# Altium PCB PCB.PcbDoc
Units mil, origin at the board's own origin, x right, y up, seen from the top; angles counter-clockwise.
Board outline 1916 x 1604 mil, 2 copper layers (Top Layer, Bottom Layer); 44 components, 38 nets, 187 pads, 12 vias.
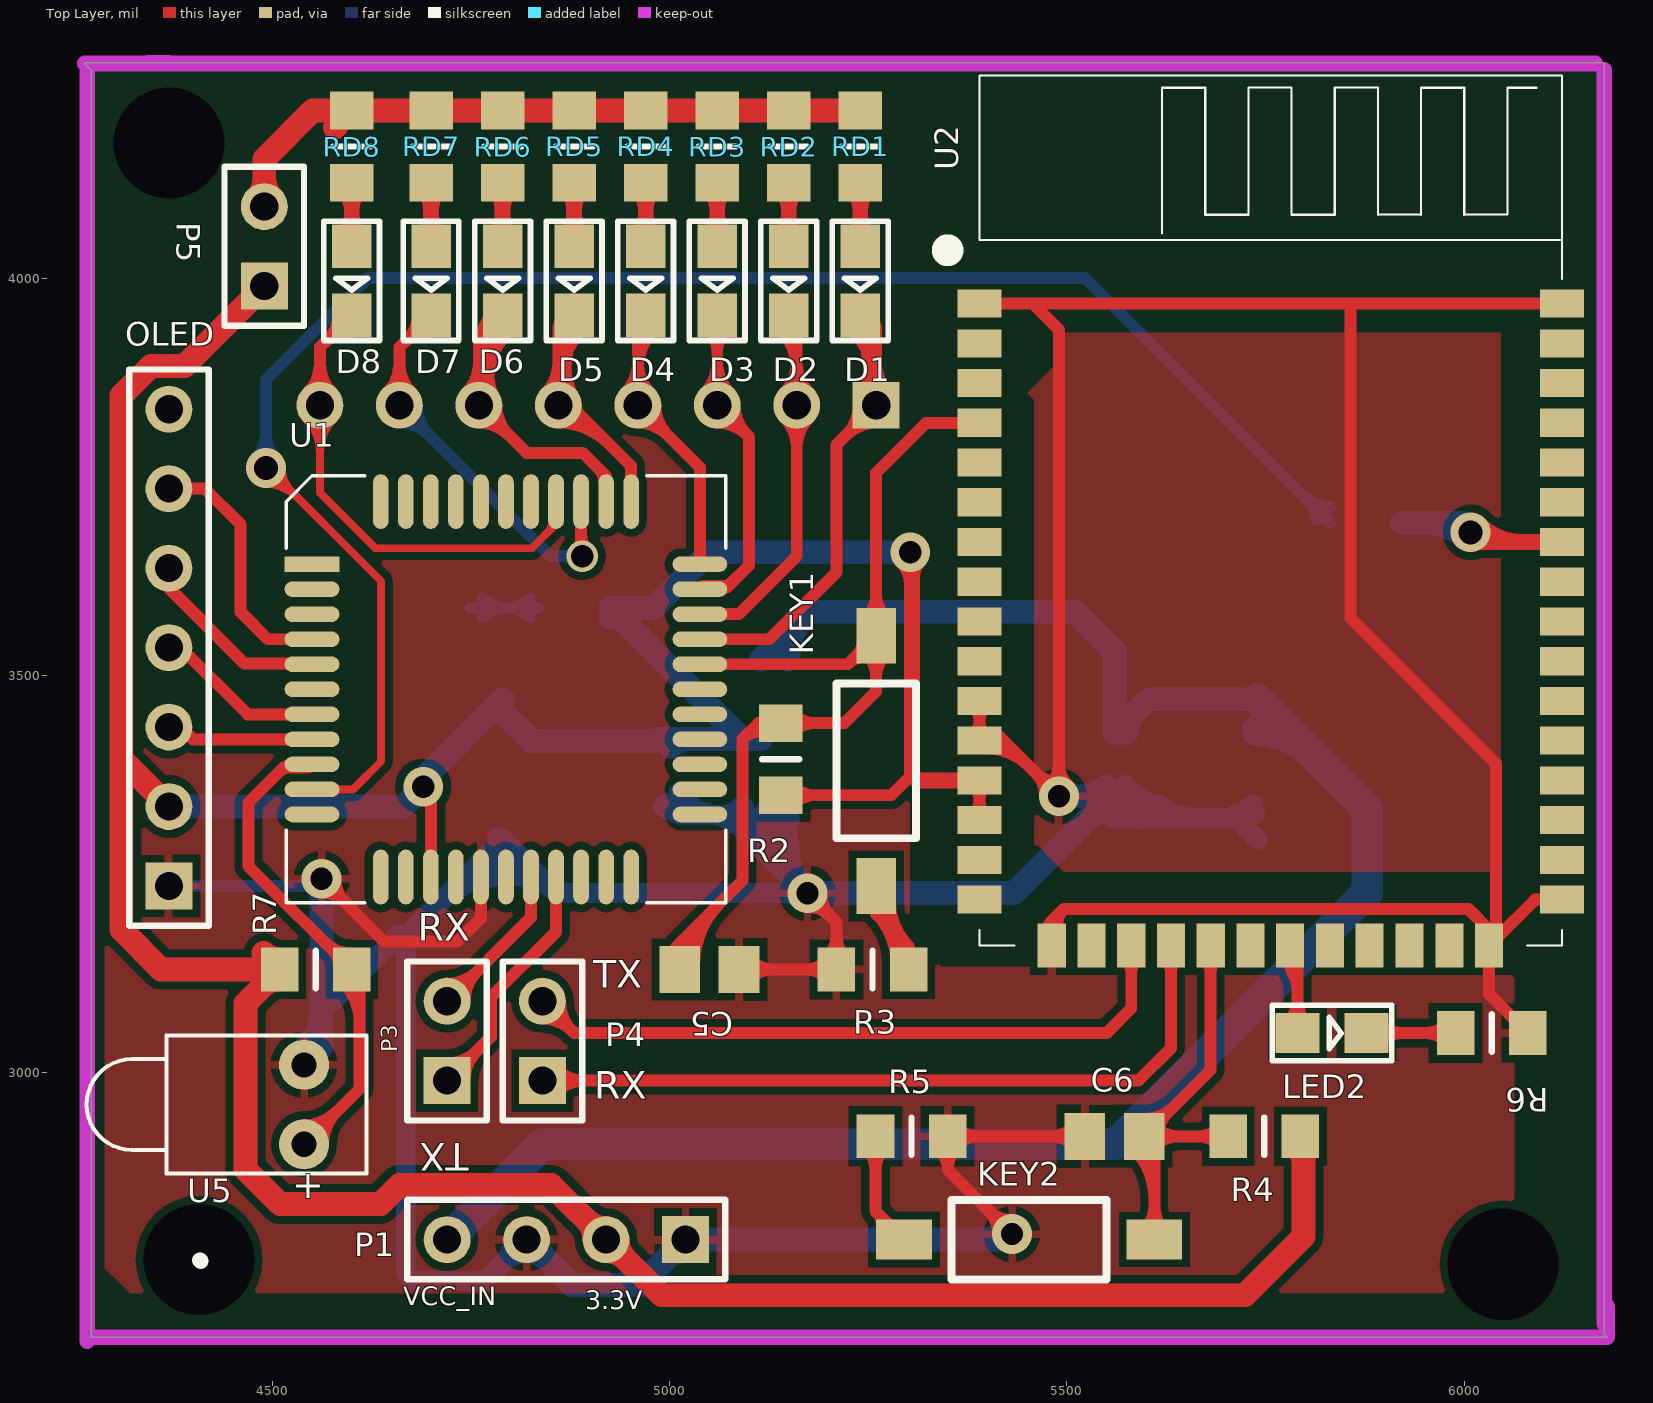
[diagram p0: Top Layer view]
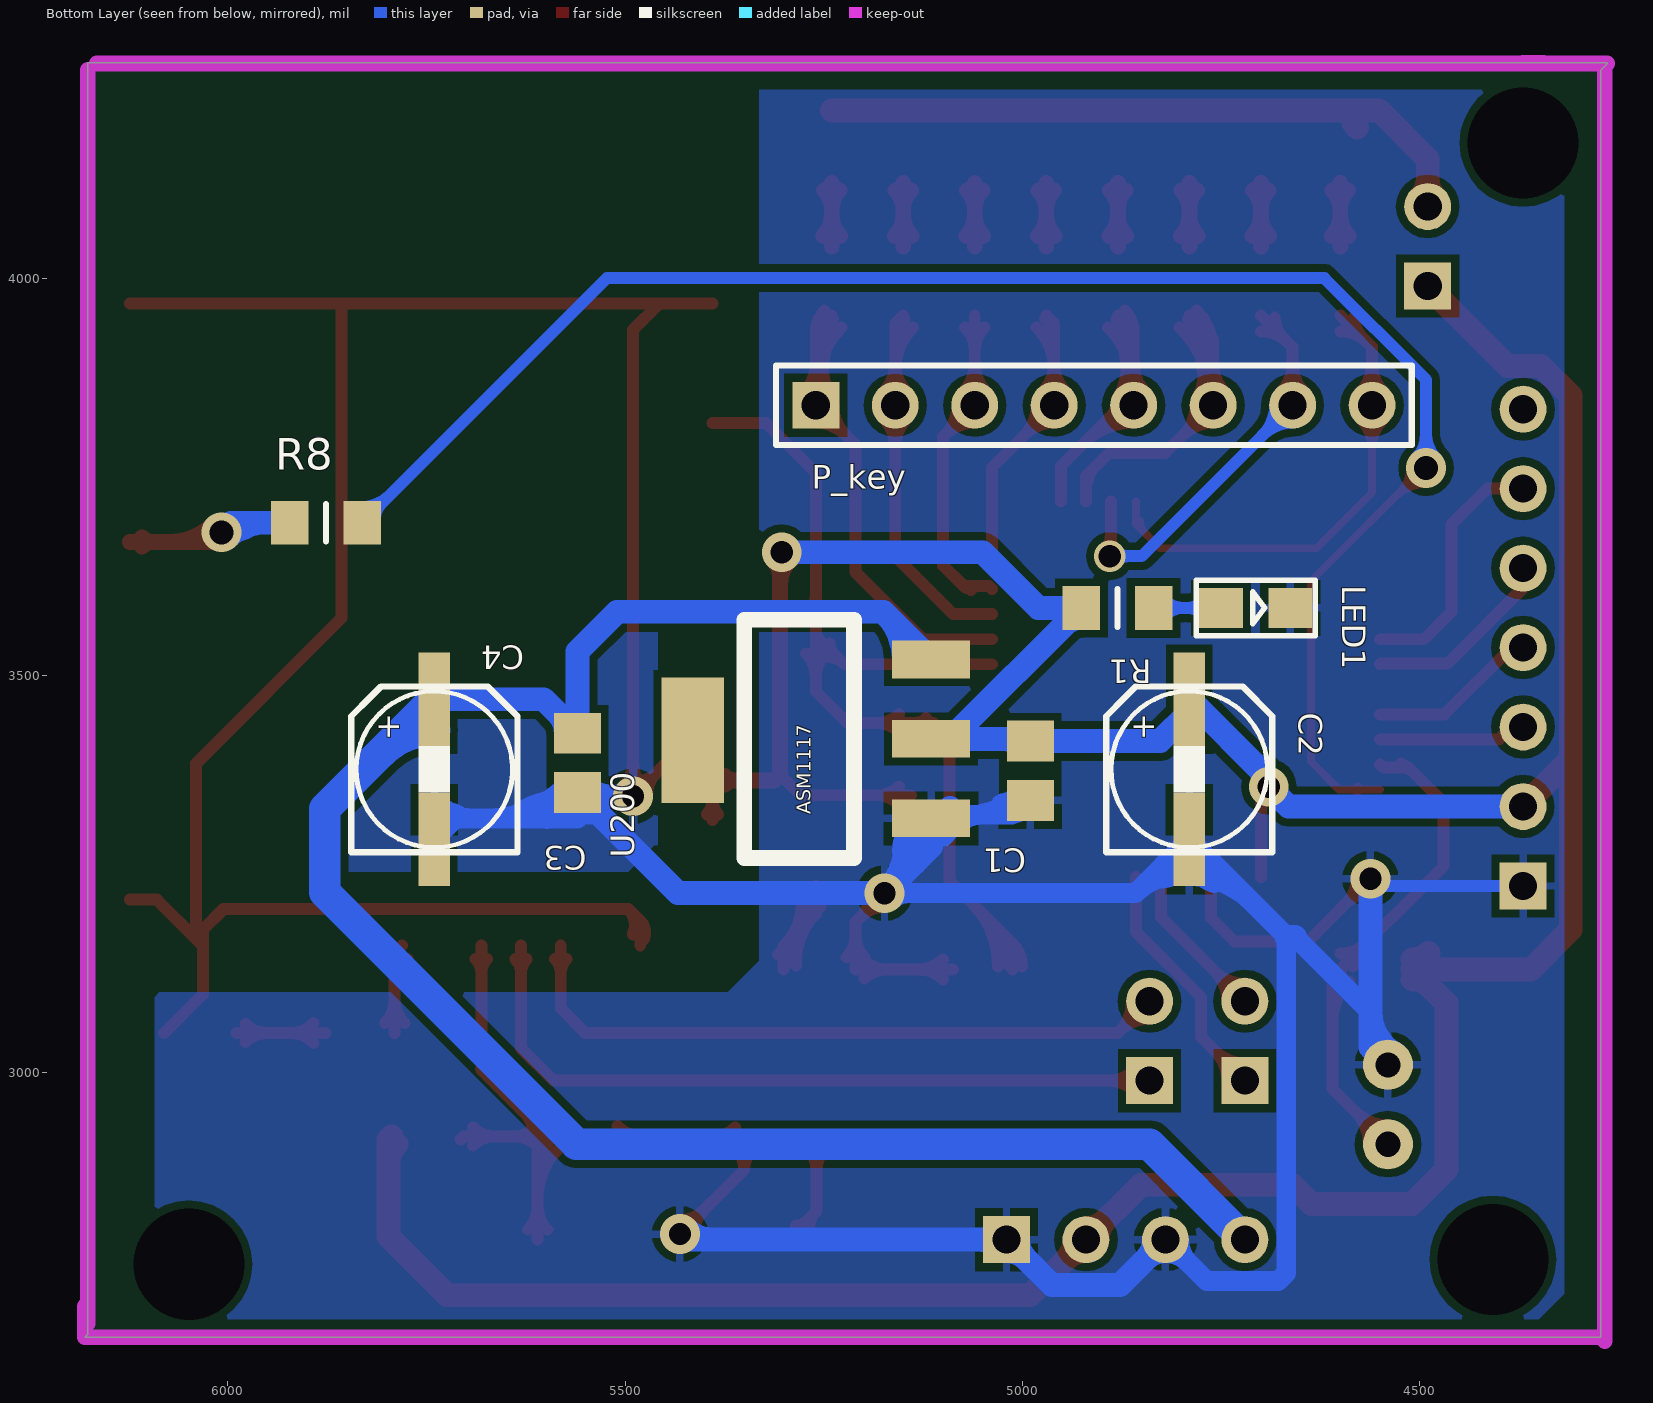
[diagram p1: Bottom Layer view, seen from below]

## Layer stack, top to bottom
Top Layer: signal copper 1.4
Dielectric: dielectric 12.6, FR-4, Dk 4.8
Bottom Layer: signal copper 1.4

## Board outline
4264,4270 4272,4262 4272,2667 6180,2667 6176,2671 6176,4271 4265,4271 4264,4270

## Design rules (kind name [scope] priority, off if disabled: settings)
Clearance [All] p1: gap=10
PolygonConnect [All] p1: connectstyle=Relief reliefconductorwidth=10 reliefentries=4 polygonreliefangle="90 Angle" airgapwidth=10
RoutingVias [All] p1: holewidth=28 width=50 viastyle="Through Hole" minholewidth=28 minwidth=50 maxholewidth=28 maxwidth=50
SolderMaskExpansion [All] p1: expansion=4
Width [All] p1: maxlimit=50 minlimit=10 preferedwidth=15
28 further rules are at their usual default settings.

## Components (designator, comment, footprint, x,y, rotation, side; value= is the part's Value field where it differs from the comment)
C1 "104" 0805-2 4990,3380 r90 bottom
C2 "10uf/16v" SMD-EC-F5 4790,3470 r270 bottom
C3 "104" 0805-2 5560,3390 r270 bottom
C4 "10uf/16v" SMD-EC-F5 5740,3470 r270 bottom
C5 "" 0805-2 5050,3130 r180 top
C6 "" 0805-2 5560,2920 r0 top
D1 "LED" SMDLED 5240,4040 r270 top
D2 "LED" SMDLED 5150,4040 r270 top
D3 "LED" SMDLED 5060,4040 r270 top
D4 "LED" SMDLED 4970,4040 r270 top
D5 "LED" SMDLED 4880,4040 r270 top
D6 "LED" SMDLED 4790,4040 r270 top
D7 "LED" SMDLED 4700,4040 r270 top
D8 "LED" SMDLED 4600,4040 r270 top
KEY1 "BUTTON" BUTTON贴片按键3*6*2.5 5260,3550 r330 top
KEY2 "BUTTON" BUTTON贴片按键3*6*2.5 5610,2790 r240 top
LED1 "LED1" SMDLED 4750,3585 r180 bottom
LED2 "LED2" SMDLED 5790,3050 r0 top
OLED "Header 7" HDR1X7 4370,3235 r90 top
P1 "Header 4" HDR1X4 5020,2790 r180 top
P3 "跳帽" HDR1X2 4720,2990 r90 top
P4 "" HDR1X2 4840,2990 r90 top
P5 "跳帽（灯开关）" HDR1X2 4490,3990 r90 top
P_key "Header 8" HDR1X8 5260,3840 r180 bottom
R1 "3kΩ" 贴片0805-有丝印 4835,3585 r0 bottom
R2 "4K" 贴片0805-有丝印 5140,3440 r270 top
R3 "100R" 贴片0805-有丝印 5210,3130 r0 top
R4 "4K" 贴片0805-有丝印 5703,2920 r0 top
R5 "100R" 贴片0805-有丝印 5350,2920 r180 top
R6 "?" 贴片0805-有丝印 6080,3050 r180 top
R7 "100R" 贴片0805-有丝印 4600,3130 r180 top
R8 "0R" 贴片0805-有丝印 5831,3692 r0 bottom
RD1 "200" 贴片0805-有丝印 5240,4120 r90 top
RD2 "200" 贴片0805-有丝印 5150,4120 r90 top
RD3 "200" 贴片0805-有丝印 5060,4120 r90 top
RD4 "200" 贴片0805-有丝印 4970,4120 r90 top
RD5 "200" 贴片0805-有丝印 4880,4120 r90 top
RD6 "200" 贴片0805-有丝印 4790,4120 r90 top
RD7 "200" 贴片0805-有丝印 4700,4120 r90 top
RD8 "200" 贴片0805-有丝印 4600,4120 r90 top
U1 "STC15L2K60S2_QFP44" PQFP44 4550,3640 r0 top
U2 "WH-BLE102-V1.1" WH-BLE102-V1.1 5390,3160 r0 top
U5 "IRLED" LED-1 4540,2960 r180 top
U200 "AMS1117" ASM117稳压芯片 5115,3320 r90 bottom

## Footprints (in the part's own frame and the unit in brackets; to place one, negate y for a bottom-side part, rotate by r counter-clockwise, add the part's x,y. Pads: shape width x height; smd on the part's side, far side on the other; paste and mask are expansions set on the pad)
0805-2 [mm]
  rect 1.3x1.5 smd: 1(-0.95,0) 2(0.95,0)
ASM117稳压芯片 [mm]
  rect 1.2x2.5 smd: 1(0,0) 2(2.54,0) 3(5.08,0)
  rect 4x2 smd: 4(2.5,7.62)
  silkscreen extent -1.27,2.46 6.35,5.97
BUTTON贴片按键3*6*2.5 [mil]
  rect 70x50 smd rot 120: 1(0,0) 2(157.48,-272.76)
  silkscreen extent -13,-246 171,-27
HDR1X2 [mm] "Connector; Header; 2 Position"
  rect 1.5x1.5 hole 0.9: 1(0,0)
  round 1.5 hole 0.9: 2(2.54,0)
  silkscreen extent -1.27,-1.27 3.81,1.27
HDR1X4 [mm] "Connector; Header; 4 Position"
  rect 1.5x1.5 hole 0.9: 1(0,0)
  round 1.5 hole 0.9: 2(2.54,0) 3(5.08,0) 4(7.62,0)
  silkscreen extent -1.27,-1.27 8.89,1.27
HDR1X7 [mm] "Connector; Header; 7 Position"
  rect 1.5x1.5 hole 0.9: 1(0,0)
  round 1.5 hole 0.9: 2(2.54,0) 3(5.08,0) 4(7.62,0) 5(10.16,0) 6(12.7,0) 7(15.24,0)
  silkscreen extent -1.27,-1.27 16.51,1.27
HDR1X8 [mm] "Connector; Header; 8 Position"
  rect 1.5x1.5 hole 0.9: 1(0,0)
  round 1.5 hole 0.9: 2(2.54,0) 3(5.08,0) 4(7.62,0) 5(10.16,0) 6(12.7,0) 7(15.24,0) 8(17.78,0)
  silkscreen extent -1.27,-1.27 19.05,1.27
LED-1 [mm] "LED; 2 Leads"
  round 1.6 hole 0.8: 1(0,1.27) 2(0,-1.27)
  silkscreen extent -2,-2.2 6.95,2.2
PQFP44 [mm]
  rect 1.75x0.5 smd: 1(0,0)
  oval 1.75x0.5 smd: 2(0,-0.8) 3(0,-1.6) 4(0,-2.4) 5(0,-3.2) 6(0,-4) 7(0,-4.8) 8(0,-5.6) 9(0,-6.4) 10(0,-7.2) 11(0,-8) 23(12.4,-8) 24(12.4,-7.2) 25(12.4,-6.4) 26(12.4,-5.6) 27(12.4,-4.8) 28(12.4,-4) 29(12.4,-3.2) 30(12.4,-2.4) 31(12.4,-1.6) 32(12.4,-0.8) 33(12.4,0)
  oval 0.5x1.75 smd: 12(2.2,-10) 13(3,-10) 14(3.8,-10) 15(4.6,-10) 16(5.4,-10) 17(6.2,-10) 18(7,-10) 19(7.8,-10) 20(8.6,-10) 21(9.4,-10) 22(10.2,-10) 34(10.2,2) 35(9.4,2) 36(8.6,2) 37(7.8,2) 38(7,2) 39(6.2,2) 40(5.4,2) 41(4.6,2) 42(3.8,2) 43(3,2) 44(2.2,2)
  silkscreen extent -0.82,-10.83 13.23,2.82
SMD-EC-F5 [mm]
  rect 3x1 smd: 1(0,0) 2(4.477,0)
  silkscreen extent -0.41,-2.65 4.89,2.66
SMDLED [mm]
  rect 1.4x1.27 smd: 1(0.001,-0.002) 2(2.211,-0.002)
  silkscreen extent -0.8,-0.89 3.01,0.89
WH-BLE102-V1.1 [mm]
  rect 1.4x0.9 smd: 1(0,20.52) 2(0,19.25) 3(0,17.98) 4(0,16.71) 5(0,15.44) 6(0,14.17) 7(0,12.9) 8(0,11.63) 9(0,10.36) 10(0,9.09) 11(0,7.82) 12(0,6.55) 13(0,5.28) 14(0,4.01) 15(0,2.74) 16(0,1.47) 29(18.62,1.47) 30(18.62,2.74) 31(18.62,4.01) 32(18.62,5.28) 33(18.62,6.55) 34(18.62,7.82) 35(18.62,9.09) 36(18.62,10.36) 37(18.62,11.63) 38(18.62,12.9) 39(18.62,14.17) 40(18.62,15.44) 41(18.62,16.71) 42(18.62,17.98) 43(18.62,19.25) 44(18.62,20.52)
  rect 0.9x1.4 smd: 17(2.31,0) 18(3.58,0) 19(4.85,0) 20(6.12,0) 21(7.39,0) 22(8.66,0) 23(9.93,0) 24(11.2,0) 25(12.47,0) 26(13.74,0) 27(15.02,0) 28(16.29,0)
  silkscreen extent -1.27,0 18.62,27.81
贴片0805-有丝印 [mm]
  rect 1.2x1.4 smd: 1(0,0) 2(2.308,0)
  silkscreen extent 1.15,-0.6 1.15,0.6, body extent 0.08,-0.7 2.23,0.7, height 0.7

## Part data
C1 C3 C5 C6: library part Cap, "无极性电容"
C2 C4: library part ECAP
LED1: library part LED2, "Typical RED, GREEN, YELLOW, AMBER GaAs LED"
LED2: "Typical RED, GREEN, YELLOW, AMBER GaAs LED"
OLED: "Header, 7-Pin"
P1: "Header, 4-Pin"
P3 P4 P5: library part "Header 2", "Header, 2-Pin"
P_key: "Header, 8-Pin"
R1: library part Res3, "Resistor"
R2 R3 R4 R5 R6 R7 R8 RD1 RD2 RD3 RD4 RD5 RD6 RD7 RD8: library part RES
U1: library part STC15F2K60S2_QFP44
U5: library part LED

## Via types
v1: diameter 50, hole 28, Top Layer to Bottom Layer, 6 vias
v2: diameter 50/50 (per signal layer), hole 139.76, Top Layer to Bottom Layer, 3 vias
v3: diameter 50/50 (per signal layer), hole 30, Top Layer to Bottom Layer, 2 vias
v4: diameter 40, hole 28, Top Layer to Bottom Layer, 1 vias

## Nets (pads, with @x,y where several pads share a name; then routed paths per layer and width w, separated by ;. In a path a pad name is that pad's centre, name@x,y a point inside that pad or via, vN(x,y) a via of type N, cw(c..) or ccw(c..) an arc to the next point about the centre after c; other vN are vias at no path point)
3.3V: C1.2 C2.1 OLED.2 P1.2 P5.1 R1.2 R2.2 R4.2 R7.2 U1.14 U2.13 U2.14 U200.2 | length 5746.4
  Top Layer w15: v1(4690,3360) 4699.61,3350.39 U1.14 ; R2.2 5279.13,3349.13 5305,3375 ; R2.2@5155.34,3337.73 cw(c5182.86,3310.21) 5182.86,3349.13 cw(c5182.86,3388.06) R2.2@5155.34,3360.53 ; U2.14@5382.78,3325.1 ccw(c5365.34,3342.54) 5390,3342.54 ccw(c5414.66,3342.54) U2.14@5397.22,3325.1 ; U2.13@5382.78,3360.65 cw(c5365.34,3343.21) 5390,3343.21 cw(c5414.66,3343.21) U2.13@5397.22,3360.65 ; U2.14 U2.13
  Top Layer w20: v1@5292.39,3644.39 cw(c5261.96,3613.96) 5305,3613.96 ; v1(5303,3655) 5305,3653 5305,3375 5312.13,3367.87 U2.13 ; 5305,3623.62 cw(c5334.38,3623.62) v1@5313.61,3644.39 ; U2.13@5374.7,3362.42 ccw(c5361.53,3349.24) 5361.53,3367.87 ccw(c5361.53,3386.5) U2.13@5374.7,3373.33
  Top Layer w30: OLED.2 4310,3395 ; R7.2@4487.69,3108.56 cw(c4509.13,3087.12) R7.2@4509.13,3117.44 ; P5.1 4389.53,3889.53 4347.41,3889.53 4310,3852.11 4310,3395 ; P1.2@4905.47,2790 ccw(c4870.4,2790) 4895.2,2814.8 ccw(c4920,2839.6) P1.2@4920,2804.53 ; P1.2@4920,2775.47 cw(c4920,2740.4) 4944.8,2765.2 cw(c4969.6,2790) P1.2@4934.53,2790 ; R4.2 5797.87,2916 5797.87,2793.87 5724,2720 4990,2720 P1.2 4851,2859 4660,2859 4636,2835 4510,2835 4466.5,2878.5 4466.5,3087.36 R7.2 4360,3130 4310,3180 4310,3395 ; R7.2@4489.17,3150.83 ccw(c4509.13,3170.79) 4509.13,3142.56 cw(c4509.13,3170.79) R7.2@4489.17,3150.83 ; R4.2@5787.77,2909.97 cw(c5763.39,2885.59) 5797.87,2885.59 ccw(c5763.39,2885.59) R4.2@5787.77,2909.97
  Bottom Layer w30: OLED.2 4665,3335 v1(4690,3360) 4690,3370 C2.1 ; C2.1@4790,3454 4826.6,3417.4 C1.2 4987.4,3420 U200.2@5090.87,3420 ; R1.2@4925.87,3572.44 cw(c4925.87,3542.12) R1.2@4947.31,3563.56 ; C1.2@5001.43,3409.91 cw(c5025.78,3385.56) 5025.78,3420 ; U200.2 U200.2@5090.87,3420 ; v1(5303,3655) 5050,3655 4980,3585 R1.2 U200.2@5090.87,3420
GND: C1.1 C2.2 C3.2 C4.2 C5.1 C6.1 LED1.2 OLED.1 P1.1 P1.3 R3.1 R5.1 R6.1 U1.16 U2.1 U2.11 U2.12 U2.17 U2.28 U2.29 U2.44 U5.2 U200.1 | length 13006.9
  Top Layer w15: v1@4561.5,3241.55 cw(c4554.96,3209.6) 4586.45,3218.04 ; v1(4562,3244) 4641,3165 4733,3165 4762.6,3194.6 U1.16 ; v1@4564.45,3244.5 ccw(c4596.4,3251.04) 4587.96,3219.55 ; C5.1 R3.1 5210,3189.54 v1(5173.54,3226) ; v1@5173.04,3223.55 cw(c5166.5,3191.6) 5197.99,3200.04 ; v1@5175.99,3226.5 ccw(c5207.94,3233.04) 5199.5,3201.55 ; U2.12@5382.78,3425.1 ccw(c5365.34,3442.54) 5390,3442.54 ccw(c5414.66,3442.54) U2.12@5397.22,3425.1 ; U2.11@5382.78,3460.65 cw(c5365.34,3443.21) 5390,3443.21 cw(c5414.66,3443.21) U2.11@5397.22,3460.65 ; U2.11 5390,3425.1 5412.9,3425.1 v1(5490,3348) 5490,3935 5457.13,3967.87 ; U2.1 5457.13,3967.87 ; U2.12@5399.84,3407.66 cw(c5399.84,3334.02) 5451.91,3386.09 ; U2.12@5399.84,3422.66 cw(c5399.84,3385.24) 5426.3,3411.7 ; 5405.04,2821.45 cw(c5396.6,2789.96) v1@5428.55,2796.5 ; 5406.55,2822.96 ccw(c5438.04,2831.4) v1@5431.5,2799.45 ; v1(5431,2797) 5350,2878 ; v1@5472.5,3348 ccw(c5430.25,3348) 5460.13,3377.87 ccw(c5490,3407.75) v1@5490,3365.5 ; v1@5477.63,3360.37 ccw(c5447.75,3390.25) 5490,3390.25 ccw(c5532.25,3390.25) v1@5502.37,3360.37 ; U2.17 5480.94,3190.94 ; C6.1 R5.1 5350,2878 ; R6.1 6031.34,3098.66 U2.28 ; U2.29 6089.21,3217.87 U2.28@6040,3168.66 ; U2.44 5857,3967.87 ; 4591.87,3214.13 ccw(c4562,3184.25) 4562,3226.5 cw(c4562,3184.25) 4591.87,3214.13 ; 4591.87,3214.13 cw(c4621.75,3244) 4579.5,3244 ccw(c4621.75,3244) 4591.87,3214.13 ; 5131.08,3130 cw(c5131.08,3173.67) 5100.19,3142.79 ccw(c5131.08,3173.67) 5131.08,3130 ; 5131.08,3130 ccw(c5131.08,3086.33) 5100.19,3117.21 cw(c5131.08,3086.33) 5131.08,3130 ; 5171.08,3130 cw(c5171.08,3091.08) 5198.6,3118.6 ccw(c5171.08,3091.08) 5171.08,3130 ; 5171.08,3130 ccw(c5171.08,3168.92) 5198.6,3141.4 cw(c5171.08,3168.92) 5171.08,3130 ; 5203.41,3196.13 cw(c5233.29,3226) 5191.04,3226 ccw(c5233.29,3226) 5203.41,3196.13 ; 5203.41,3196.13 ccw(c5173.54,3166.25) 5173.54,3208.5 cw(c5173.54,3166.25) 5203.41,3196.13 ; 5210,3172.86 cw(c5171.08,3172.86) 5198.6,3145.34 ccw(c5171.08,3172.86) 5210,3172.86 ; 5210,3172.86 ccw(c5248.92,3172.86) 5221.4,3145.34 cw(c5248.92,3172.86) 5210,3172.86 ; 5350,2878 cw(c5386.87,2878) 5361.22,2904.48 ccw(c5386.87,2878) 5350,2878 ; 5350,2878 ccw(c5313.13,2878) 5338.78,2904.48 cw(c5313.13,2878) 5350,2878 ; 5388.92,2920 cw(c5388.92,2958.92) 5361.4,2931.4 ccw(c5388.92,2958.92) 5388.92,2920 ; 5388.92,2920 ccw(c5388.92,2881.08) 5361.4,2908.6 cw(c5388.92,2881.08) 5388.92,2920 ; 5401.13,2826.87 cw(c5371.25,2797) 5413.5,2797 ccw(c5371.25,2797) 5401.13,2826.87 ; 5401.13,2826.87 ccw(c5431,2856.75) 5431,2814.5 cw(c5431,2856.75) 5401.13,2826.87 ; 5457.13,3967.87 5857,3967.87 ; 5478.92,2920 cw(c5478.92,2876.33) 5509.81,2907.21 ccw(c5478.92,2876.33) 5478.92,2920 ; 5478.92,2920 ccw(c5478.92,2963.67) 5509.81,2932.79 cw(c5478.92,2963.67) 5478.92,2920 ; 5480.94,3190.94 cw(c5464.26,3190.94) 5474.61,3177.86 ccw(c5464.26,3190.94) 5480.94,3190.94 ; 5480.94,3190.94 ccw(c5497.63,3190.94) 5487.28,3177.86 cw(c5497.63,3190.94) 5480.94,3190.94 ; 5480.94,3190.94 5496,3206 ; 5496,3206 ccw(c5516.11,3185.89) 5490.24,3174.08 cw(c5516.11,3185.89) 5496,3206 ; 5496,3206 6005.36,3206 6031.34,3180.02 U2.28 ; 5857,3967.87 5857,3572 6040,3389 U2.28@6040,3168.66 ; U2.28 U2.28@6040,3168.66 ; U2.17@5476.59,3167.86 cw(c5495.12,3176.32) 5480.72,3190.72 ccw(c5495.12,3176.32) U2.17@5476.59,3167.86
  Bottom Layer w15: OLED.1 4553,3235 v1(4562,3244) ; C1.1 5012.6,3320 U200.1 ; C1.1@4995.67,3340.04 cw(c5014.34,3312.53) 5031.03,3341.28 ; C1.1@5000.82,3325.87 cw(c5014.53,3292.52) 5032.56,3323.75 ; C1.1@5004.09,3327.63 cw(c5029.2,3290.6) 5051.67,3329.29 ; C1.1@5011.41,3347.28 ccw(c5043.75,3355.95) 5027.01,3326.95 ; 5527.4,3320 5560,3320 ; C3.2@5555.4,3348 C3.2 ; 5050.49,3320 ccw(c5050.49,3358.92) 5078.01,3331.4 cw(c5050.49,3358.92) 5050.49,3320 ; 5050.49,3320 cw(c5050.49,3281.08) 5078.01,3308.6 ccw(c5050.49,3281.08) 5050.49,3320 ; 5560,3320 cw(c5580.32,3320) 5569.57,3337.25 ccw(c5580.32,3320) 5560,3320 ; 5560,3320 ccw(c5539.68,3320) 5550.43,3337.25 cw(c5539.68,3320) 5560,3320 ; C1.1@4985.52,3334.18 ccw(c5019.74,3368.4) 5019.74,3320 cw(c5019.74,3368.4) C1.1@4985.52,3334.18 ; C1.1@4996.12,3344.78 ccw(c5055.96,3404.62) 5055.96,3320 cw(c5055.96,3404.62) C1.1@4996.12,3344.78 ; C1.1@5006.73,3355.39 ccw(c5092.17,3440.83) 5092.17,3320 cw(c5092.17,3440.83) C1.1@5006.73,3355.39 ; 5050.33,3331.21 cw(c5039.63,3291.26) 5075.45,3311.94 ccw(c5039.63,3291.26) 5050.33,3331.21 ; 5053.66,3330.32 ccw(c5063.11,3365.56) 5081.35,3333.96 cw(c5063.11,3365.56) 5053.66,3330.32
  Bottom Layer w25: 4562,3076 4657,3171 ; 4758.86,3238.85 ccw(c4748.23,3278.49) C2.2@4783.78,3257.97 ; C2.2@4795.54,3258.95 ccw(c4827.2,3285.07) 4823.28,3244.22 ; P1.3 4767.97,2737.97 4678.03,2737.97 4667.97,2748.03 4667.97,3171 4667.97,3171.72 C2.2 4857.75,3226 ; v1(5173.54,3226) 4857.75,3226 ; 5560,3320 5713.75,3320 ; C3.2@5567.33,3339.95 cw(c5586.68,3267.73) 5624.07,3332.48 ; C3.2@5577,3353.52 ccw(c5619.65,3356.53) 5598.27,3319.49 ; 5710.54,3324.12 cw(c5726.42,3296.61) C4.2@5737.49,3326.38 ; 5711.06,3319.28 ccw(c5701.38,3355.42) C4.2@5733.78,3336.71 ; C4.2 5713.75,3320 ; 4790.93,2760.93 cw(c4820,2731.86) 4820,2772.97 ccw(c4820,2731.86) 4790.93,2760.93 ; 4790.93,2760.93 ccw(c4761.86,2790) 4802.97,2790 cw(c4761.86,2790) 4790.93,2760.93 ; 4857.75,3226 ccw(c4803.81,3172.07) 4791.19,3247.29 cw(c4803.81,3172.07) 4857.75,3226 ; 5143.36,3226 ccw(c5143.36,3256.18) 5164.7,3234.84 cw(c5143.36,3256.18) 5143.36,3226 ; 5143.36,3226 cw(c5143.36,3195.82) 5164.7,3217.16 ccw(c5143.36,3195.82) 5143.36,3226 ; 5713.75,3320 ccw(c5713.75,3339.94) 5733.05,3334.92 cw(c5713.75,3339.94) 5713.75,3320 ; 4710.53,3214.27 cw(c4790,3134.8) 4790,3247.19 ccw(c4790,3134.8) 4710.53,3214.27 ; 4753.2,3256.95 cw(c4790,3220.15) 4790,3272.19 ccw(c4790,3220.15) 4753.2,3256.95 ; C2.2@4782.92,3296.6 cw(c4784.1,3289.57) 4789.13,3294.61 ccw(c4784.1,3289.57) C2.2@4782.92,3296.6 ; C2.2@4787.05,3271.95 cw(c4793.95,3230.82) 4823.44,3260.31 ccw(c4793.95,3230.82) C2.2@4787.05,3271.95 ; C3.2@5555.52,3344.18 ccw(c5613.88,3402.55) 5613.88,3320 cw(c5613.88,3402.55) C3.2@5555.52,3344.18 ; 5560,3319.76 cw(c5587.08,3319.76) 5571.48,3341.9 ccw(c5587.08,3319.76) 5560,3319.76 ; C3.2@5573.19,3361.85 ccw(c5674.24,3462.9) 5674.24,3320 cw(c5674.24,3462.9) C3.2@5573.19,3361.85 ; 5690.98,3320 ccw(c5690.98,3382.13) 5734.92,3338.2 cw(c5690.98,3382.13) 5690.98,3320
  Bottom Layer w30: U5.2 4562,3032 4562,3076 ; U5.2@4552.69,3020.54 cw(c4567.22,3032.6) 4553.99,3046.08 ; v1(4562,3244) 4562,3076 ; 4657,3171 4667.97,3171 ; P1.3 4877,2733 4963,2733 P1.1 5424,2790 v1(5431,2797) ; U200.1@5108.91,3313.9 cw(c5082.27,3287.24) 5119.96,3287.26 ; U200.1 5115,3284.54 v1(5173.54,3226) ; U200.1@5134.5,3313.9 cw(c5099.69,3279.06) 5148.94,3279.08 ; v1(5490,3348) 5555.4,3348 5527.4,3320 5433.4,3226 v1(5173.54,3226) ; 5519.39,3348 ccw(c5519.39,3389.27) C3.2@5548.57,3360.09 ; 4562,3076 cw(c4502.68,3076) 4531.88,3024.36 ccw(c4502.68,3076) 4562,3076 ; 4844.8,2765.2 cw(c4869.6,2790) 4834.53,2790 ccw(c4869.6,2790) 4844.8,2765.2 ; 4844.8,2765.2 ccw(c4820,2740.4) 4820,2775.47 cw(c4820,2740.4) 4844.8,2765.2 ; P1.1@4995.2,2765.2 cw(c5020,2740.4) 5020,2775.47 ccw(c5020,2740.4) P1.1@4995.2,2765.2 ; P1.1@4995.2,2765.2 ccw(c4970.4,2790) 5005.47,2790 cw(c4970.4,2790) P1.1@4995.2,2765.2 ; 5055.07,2790 cw(c5055.07,2825.07) 5030.27,2800.27 ccw(c5055.07,2825.07) 5055.07,2790 ; 5055.07,2790 ccw(c5055.07,2754.93) 5030.27,2779.73 cw(c5055.07,2754.93) 5055.07,2790 ; v1(5173.54,3226) cw(c5240.76,3293.22) 5148.92,3317.77 ccw(c5240.76,3293.22) v1(5173.54,3226) ; C3.2@5535.2,3327.8 ccw(c5510.4,3352.6) C3.2@5545.47,3352.6 ; C3.2@5535.2,3327.8 ccw(c5510.4,3352.6) C3.2@5545.47,3352.6 ; C3.2@5535.2,3327.8 ccw(c5510.4,3352.6) C3.2@5545.47,3352.6 ; C3.2@5535.2,3327.8 ccw(c5510.4,3352.6) C3.2@5545.47,3352.6 ; C3.2@5535.2,3327.8 ccw(c5510.4,3352.6) C3.2@5545.47,3352.6 ; C3.2@5535.2,3327.8 ccw(c5510.4,3352.6) C3.2@5545.47,3352.6 ; U200.1@5090.96,3333.27 ccw(c5124.71,3324.24) 5100.01,3299.53 cw(c5124.71,3324.24) U200.1@5090.96,3333.27 ; U200.1@5119.94,3325.52 ccw(c5182.74,3308.73) 5136.77,3262.77 cw(c5182.74,3308.73) U200.1@5119.94,3325.52 ; 5389.96,2790 ccw(c5389.96,2838.04) 5423.93,2804.07 cw(c5389.96,2838.04) 5389.96,2790
INFRARED: R7.1 U1.9 U5.1 | length 946.8
  Top Layer w15: 4515.24,3382.97 ccw(c4511.78,3395.89) U1.9@4523.37,3389.2 ; U5.1 4610,2980 4610,3120 R7.1 4470,3260 4470,3339.81 4514.07,3383.88 ; U5.1@4540,2934 ccw(c4540,2991.93) 4580.96,2950.96 ccw(c4621.93,2910) U5.1@4564,2910 ; U1.9 4545.85,3383.88 4514.07,3383.88 ; 4565.76,3164.24 ccw(c4600,3198.49) R7.1@4600,3150.06 ; 4575.26,3154.74 cw(c4554.46,3133.94) R7.1@4583.88,3133.94 ; R7.1@4588.6,3114.66 cw(c4536.94,3063) 4610,3063 ; R7.1@4599.21,3125.27 cw(c4573.15,3099.21) 4610,3099.21 ; 4514.07,3383.88 cw(c4520.75,3377.2) 4524.47,3385.88 ccw(c4520.75,3377.2) 4514.07,3383.88 ; 4514.07,3383.88 ccw(c4514.07,3394.66) U1.9@4523.37,3389.21 ; 4514.07,3383.88 ccw(c4514.07,3394.66) U1.9@4523.37,3389.21 ; 4509.15,3378.96 cw(c4525.39,3362.72) 4525.39,3385.69 ccw(c4525.39,3362.72) 4509.15,3378.96
NetD1_1: D1.1 RD1.1 | length 188.6
  Top Layer w20: D1.1@5229.33,4053.13 ccw(c5203.72,4078.74) 5239.94,4078.74 ccw(c5276.15,4078.74) D1.1@5250.54,4053.13 ; RD1.1@5230.37,4110.37 cw(c5207.27,4087.27) 5239.94,4087.27 ; D1.1 5239.94,4119.94 RD1.1 ; 5239.94,4086.96 cw(c5273.04,4086.96) RD1.1@5249.63,4110.37
NetD2_1: D2.1 RD2.1 | length 188.6
  Top Layer w20: D2.1@5139.33,4053.13 ccw(c5113.57,4078.89) 5150,4078.89 ; RD2.1@5140.37,4110.37 cw(c5117.11,4087.11) 5150,4087.11 cw(c5182.89,4087.11) RD2.1@5159.63,4110.37 ; D2.1 5150,4040.03 RD2.1 ; 5150,4078.59 ccw(c5186,4078.59) D2.1@5160.54,4053.13
NetD3_1: D3.1 RD3.1 | length 188.6
  Top Layer w20: D3.1@5049.33,4053.13 ccw(c5023.72,4078.74) 5059.94,4078.74 ccw(c5096.15,4078.74) D3.1@5070.54,4053.13 ; RD3.1@5050.37,4110.37 cw(c5027.27,4087.27) 5059.94,4087.27 ; D3.1 5059.94,4119.94 RD3.1 ; 5059.94,4086.96 cw(c5093.04,4086.96) RD3.1@5069.63,4110.37
NetD4_1: D4.1 RD4.1 | length 188.6
  Top Layer w20: D4.1@4959.33,4053.13 ccw(c4933.57,4078.89) 4970,4078.89 ; RD4.1@4960.37,4110.37 cw(c4937.11,4087.11) 4970,4087.11 cw(c5002.89,4087.11) RD4.1@4979.63,4110.37 ; D4.1 4970,4040.03 RD4.1 ; 4970,4078.59 ccw(c5006,4078.59) D4.1@4980.54,4053.13
NetD5_1: D5.1 RD5.1 | length 188.5
  Top Layer w20: D5.1@4869.33,4053.13 ccw(c4843.72,4078.74) 4879.94,4078.74 ccw(c4916.15,4078.74) D5.1@4890.54,4053.13 ; RD5.1@4870.37,4110.37 cw(c4847.27,4087.27) 4879.94,4087.27 ; D5.1 RD5.1@4879.94,4119.94 ; 4879.94,4086.96 cw(c4913.04,4086.96) RD5.1@4889.63,4110.37
NetD6_1: D6.1 RD6.1 | length 188.6
  Top Layer w20: D6.1@4779.33,4053.13 ccw(c4753.72,4078.74) 4789.94,4078.74 ccw(c4826.15,4078.74) D6.1@4800.54,4053.13 ; RD6.1@4780.37,4110.37 cw(c4757.27,4087.27) 4789.94,4087.27 ; D6.1 4789.94,4119.94 RD6.1 ; 4789.94,4086.96 cw(c4823.04,4086.96) RD6.1@4799.63,4110.37
NetD7_1: D7.1 RD7.1 | length 188.6
  Top Layer w20: D7.1@4689.33,4053.13 ccw(c4663.57,4078.89) 4700,4078.89 ; RD7.1@4690.37,4110.37 cw(c4667.11,4087.11) 4700,4087.11 cw(c4732.89,4087.11) RD7.1@4709.63,4110.37 ; D7.1 4700,4040.03 RD7.1 ; 4700,4078.59 ccw(c4736,4078.59) D7.1@4710.54,4053.13
NetD8_1: D8.1 RD8.1 | length 188.6
  Top Layer w20: D8.1@4589.33,4053.13 ccw(c4563.57,4078.89) 4600,4078.89 ; RD8.1@4590.37,4110.37 cw(c4567.11,4087.11) 4600,4087.11 cw(c4632.89,4087.11) RD8.1@4609.63,4110.37 ; D8.1 4600,4040.03 RD8.1 ; 4600,4078.59 ccw(c4636,4078.59) D8.1@4610.54,4053.13
NetKEY1_2: KEY1.2 R3.2 | length 456
  Top Layer w15: KEY1.2 5260,3200 ; KEY1.2@5262.49,3224.82 ccw(c5316.35,3220.11) 5278.12,3181.88 ; KEY1.2@5277.43,3223.51 ccw(c5358.17,3216.45) 5300.86,3159.14 ; 5283.63,3176.37 cw(c5244.5,3137.24) R3.2@5299.75,3134 ; R3.2@5284.77,3134.88 ccw(c5199.86,3139.85) 5260,3200 ; R3.2 5300.87,3159.13 ; 5260,3200 cw(c5269.16,3200) 5266.01,3208.61 ccw(c5269.16,3200) 5260,3200 ; 5260,3200 ccw(c5250.84,3200) 5253.99,3208.61 cw(c5250.84,3200) 5260,3200 ; 5260,3200 5300.87,3159.13 ; 5300.87,3159.13 cw(c5289.24,3159.13) 5294.11,3148.58 ccw(c5289.24,3159.13) 5300.87,3159.13 ; 5300.87,3159.13 ccw(c5312.49,3159.13) 5307.62,3148.58 cw(c5312.49,3159.13) 5300.87,3159.13
NetKEY2_2: KEY2.2 R5.2 | length 254.7
  Top Layer w15: R5.2@5247.73,2904.66 cw(c5220.21,2877.14) 5259.13,2877.14 cw(c5298.06,2877.14) R5.2@5270.53,2904.66 ; R5.2 5259.13,2825.91 ; KEY2.2@5268.04,2794.14 ccw(c5235.34,2802.11) 5259.14,2825.9 ; KEY2.2@5272.24,2812.8 ccw(c5285.04,2825.61) KEY2.2@5285.04,2807.5 ; KEY2.2 5259.13,2825.91
NetLED1_1: LED1.1 R1.1 | length 212.6
  Bottom Layer w15: LED1.1 4750.03,3585 R1.1 ; LED1.1@4764.9,3572.56 cw(c4794.93,3542.53) 4794.93,3585 ; LED1.1@4764.9,3597.31 ccw(c4794.62,3627.03) 4794.62,3585 ; R1.1@4823.6,3573.6 ccw(c4796.08,3546.08) 4796.08,3585 ccw(c4796.08,3623.92) R1.1@4823.6,3596.4
NetLED2_1: LED2.1 U2.23 | length 289.3
  Top Layer w15: LED2.1@5777.66,3062.31 ccw(c5747.78,3092.18) 5790.03,3092.18 ccw(c5832.28,3092.18) LED2.1@5802.41,3062.31 ; U2.23 5790.03,3150.91 LED2.1 ; 5785.28,3122.9 cw(c5799.46,3131.08) U2.23@5788.06,3142.83 ; U2.23@5773.72,3142.93 cw(c5734.34,3103.55) 5790.03,3103.55 ccw(c5734.34,3103.55) U2.23@5773.72,3142.93
NetLED2_2: LED2.2 R6.2 | length 239.6
  Top Layer w15: LED2.2 5933,3049.94 5933.06,3050 R6.2 ; LED2.2@5891.97,3037.56 cw(c5921.85,3007.69) 5921.85,3049.94 cw(c5921.85,3092.18) LED2.2@5891.97,3062.31 ; R6.2@5977.73,3038.6 ccw(c5950.21,3011.08) 5950.21,3050 ccw(c5950.21,3088.92) R6.2@5977.73,3061.4
NetP3_1: P3.1 U1.19 | length 396.6
  Top Layer w15: P3.1 4775,3045 4775,3095 4857.09,3177.09 U1.19 ; P3.1@4720,3012.03 ccw(c4720,3065.21) 4757.6,3027.6 ccw(c4795.21,2990) P3.1@4742.03,2990
NetP3_2: P3.2 U1.18 | length 283.6
  Top Layer w15: P3.2 4825.59,3195.59 U1.18 ; P3.2@4720,3112.03 ccw(c4720,3165.21) 4757.6,3127.6 ccw(c4795.21,3090) P3.2@4742.03,3090
NetP4_1: P4.1 U2.20 | length 1098
  Top Layer w15: P4.1 5590,2990 5630.94,3030.94 U2.20 ; P4.1@4855.58,2974.42 cw(c4893.18,2936.82) 4893.18,2990 cw(c4893.18,3043.18) P4.1@4855.58,3005.58 ; 5630.94,3125.49 cw(c5655.61,3125.49) 5638.17,3142.93 ccw(c5655.61,3125.49) 5630.94,3125.49 ; 5630.94,3125.49 ccw(c5606.28,3125.49) 5623.72,3142.93 cw(c5606.28,3125.49) 5630.94,3125.49
NetP4_2: P4.2 U2.19 | length 1010.4
  Top Layer w15: P4.2@4840,3067.97 cw(c4840,3014.79) 4877.6,3052.4 cw(c4915.21,3090) P4.2@4862.03,3090 ; P4.2 4880,3050 5550,3050 5580.94,3080.94 U2.19 ; 5580.94,3125.49 cw(c5605.61,3125.49) 5588.17,3142.93 ccw(c5605.61,3125.49) 5580.94,3125.49 ; 5580.94,3125.49 ccw(c5556.28,3125.49) 5573.72,3142.93 cw(c5556.28,3125.49) 5580.94,3125.49
NetP5_2: P5.2 RD1.2 RD2.2 RD3.2 RD4.2 RD5.2 RD6.2 RD7.2 RD8.2 | length 914.1
  Top Layer w30: P5.2@4479.73,4100.27 ccw(c4454.93,4125.07) 4490,4125.07 ccw(c4525.07,4125.07) P5.2@4500.27,4100.27 ; P5.2 4490,4150 4550.87,4210.87 RD8.2 RD7.2 RD6.2 RD5.2 RD4.2 RD3.2 RD2.2 RD1.2 ; RD8.2@4578.56,4189.43 ccw(c4557.12,4210.87) RD8.2@4587.44,4210.87
NetR8_2: R8.2 U2.38 | length 460.1
  Top Layer w20: v3(6008,3680) 6020.13,3667.87 U2.38 ; v3@6018.61,3690.61 ccw(c6073.49,3745.49) 6073.49,3667.87 ; 6094.6,3667.87 cw(c6094.6,3649.24) 6107.77,3662.42 ccw(c6094.6,3649.24) 6094.6,3667.87 ; 6094.6,3667.87 ccw(c6094.6,3686.5) 6107.77,3673.33 cw(c6094.6,3686.5) 6094.6,3667.87
  Bottom Layer w30: R8.2 5996,3692 v3(6008,3680) ; 5976.57,3686.99 ccw(c5988.48,3707.62) v3@6002.23,3688.17 ; 5954.89,3692 cw(c5954.89,3626.89) 6000.93,3672.93 ccw(c5954.89,3626.89) 5954.89,3692
NRELOAD: C6.2 KEY2.1 R4.1 U2.21 | length 945.8
  Top Layer w15: C6.2@5584.61,2903.27 cw(c5523.31,2841.97) 5610,2841.97 ; C6.2@5595.22,2913.88 cw(c5559.53,2878.19) 5610,2878.19 ; C6.2@5597.4,2942.03 ccw(c5597.4,2995.21) 5635,2957.6 ; KEY2.1@5597.63,2802.37 ccw(c5567.75,2832.25) 5610,2832.25 ccw(c5652.25,2832.25) KEY2.1@5622.37,2802.37 ; KEY2.1 C6.2@5610,2900 ; C6.2@5610.19,2907.21 cw(c5641.08,2876.33) 5641.08,2920 cw(c5641.08,2963.67) C6.2@5610.19,2932.79 ; C6.2@5615.49,2923.94 cw(c5649.66,2923.94) 5625.5,2948.1 ; U2.21 5680.94,3003.54 C6.2 R4.1 R4.1@5707,2916 ; R4.1@5691.6,2908.6 ccw(c5664.08,2881.08) 5664.08,2920 ccw(c5664.08,2958.92) R4.1@5691.6,2931.4 ; 5680.94,3125.49 cw(c5705.61,3125.49) 5688.17,3142.93 ccw(c5705.61,3125.49) 5680.94,3125.49 ; 5680.94,3125.49 ccw(c5656.28,3125.49) 5673.72,3142.93 cw(c5656.28,3125.49) 5680.94,3125.49
NRESET: C5.2 KEY1.1 R2.1 U1.29 U2.4 | length 1923.7
  Top Layer w15: C5.2@5000.69,3133.94 cw(c5041.13,3133.94) 5012.53,3162.53 ; C5.2 5012.6,3162.6 ; C5.2@5015.69,3133.94 cw(c5092.34,3133.94) 5038.14,3188.14 ; C5.2@5030.69,3133.94 cw(c5143.56,3133.94) 5063.75,3213.75 ; U1.29 5224.02,3514.02 ; R2.1@5155.34,3428.6 cw(c5182.86,3401.08) 5182.86,3440 cw(c5182.86,3478.92) R2.1@5155.34,3451.4 ; KEY1.1@5237.2,3527.2 ccw(c5224.39,3540) KEY1.1@5242.5,3540 ; KEY1.1@5247.63,3527.63 cw(c5217.75,3497.75) 5260,3497.75 cw(c5302.25,3497.75) KEY1.1@5272.37,3527.63 ; KEY1.1@5255.9,3522.99 ccw(c5247.96,3490.08) 5224.02,3514.02 ; U2.4 5322.87,3817.87 5260,3755 KEY1.1 ; 5012.6,3162.6 cw(c4998.94,3162.6) 5004.82,3150.27 ccw(c4998.94,3162.6) 5012.6,3162.6 ; 5012.6,3162.6 ccw(c5026.26,3162.6) 5020.38,3150.27 cw(c5026.26,3162.6) 5012.6,3162.6 ; 5012.6,3162.6 5092,3242 5092,3420 ; 5092,3420 cw(c5114.21,3397.79) 5128.65,3425.68 ccw(c5114.21,3397.79) 5092,3420 ; 5092,3420 5112,3440 ; 5112,3440 cw(c5112,3430.1) 5121.15,3433.87 ccw(c5112,3430.1) 5112,3440 ; 5112,3440 ccw(c5112,3449.9) 5121.15,3446.13 cw(c5112,3449.9) 5112,3440 ; 5112,3440 R2.1 5220,3440 5260,3480 KEY1.1 ; 5224.02,3514.02 KEY1.1 ; 5260,3602.25 cw(c5217.75,3602.25) 5247.63,3572.37 ccw(c5217.75,3602.25) 5260,3602.25 ; 5260,3602.25 ccw(c5302.25,3602.25) 5272.37,3572.37 cw(c5302.25,3602.25) 5260,3602.25 ; 5106.5,3434.5 cw(c5124.1,3416.9) 5135.55,3439 ccw(c5124.1,3416.9) 5106.5,3434.5
OLED-RST-KEY4: OLED.5 U1.5 | length 244.8
  Top Layer w15: OLED.5 4370,3610 4465,3515 4549.02,3515 U1.5
OLED_DC: OLED.6 U1.4 | length 322.9
  Top Layer w15: OLED.6 4415,3735 4460,3690 4460,3580 4494.49,3545.51 U1.4
OLED_MOSI: OLED.4 U1.7 | length 214.8
  Top Layer w15: OLED.4 4385,3535 4468.98,3451.02 U1.7
OLED_SCK: OLED.3 U1.8 | length 186.4
  Top Layer w15: OLED.3 4385,3435 4400.47,3419.53 U1.8
P0_0: D1.2 P_key.1 U1.30 | length 985
  Top Layer w15: U1.30 5125.51,3545.51 5210,3630 5210,3790 P_key.1 5260,3932.9 D1.2 ; D1.2@5227.56,3938.03 cw(c5149.25,3859.72) P_key.1@5260,3859.72 ; P_key.1@5237.97,3840 cw(c5184.79,3840) 5222.4,3802.4 cw(c5260,3764.79) P_key.1@5260,3817.97 ; D1.2@5238.17,3948.63 cw(c5185.46,3895.93) 5260,3895.93 ; P_key.1@5241.05,3851.24 ccw(c5180.98,3886.86) 5248.65,3904.15 ; P_key.1@5244.42,3855.58 ccw(c5206.82,3893.18) 5260,3893.18 ccw(c5313.18,3893.18) P_key.1@5275.58,3855.58 ; D1.2@5248.78,3959.24 cw(c5221.68,3932.14) D1.2@5260,3932.14 ; 5254.48,3881.32 ccw(c5289.86,3890.36) P_key.1@5271.24,3858.95
P0_1: D2.2 P_key.2 U1.31 | length 718.1
  Top Layer w15: U1.31 5087.01,3577.01 5160,3650 P_key.2 5160,3942.9 D2.2 ; D2.2@5137.56,3938.03 cw(c5083.39,3883.86) 5160,3883.86 ; P_key.2@5144.42,3824.42 cw(c5106.82,3786.82) 5160,3786.82 cw(c5213.18,3786.82) P_key.2@5175.58,3824.42 ; P_key.2@5144.42,3855.58 ccw(c5106.82,3893.18) 5160,3893.18 ccw(c5213.18,3893.18) P_key.2@5175.58,3855.58 ; D2.2@5148.17,3948.63 cw(c5119.61,3920.07) 5160,3920.07
P0_2: D3.2 P_key.3 U1.32 | length 679.2
  Top Layer w15: U1.32 5042.34,3612.66 5074.12,3612.66 ; P_key.3@5044.42,3855.58 ccw(c5006.82,3893.18) 5060,3893.18 ccw(c5113.18,3893.18) P_key.3@5075.58,3855.58 ; D3.2@5047.56,3938.03 cw(c5017.54,3908) 5060,3908 ; D3.2 5060,3952.9 P_key.3 5100,3800 5100,3638.54 5074.12,3612.66 ; P_key.3@5060,3817.97 cw(c5060,3764.79) 5097.6,3802.4 cw(c5135.21,3840) P_key.3@5082.03,3840 ; 5060,3908.31 cw(c5102.03,3908.31) D3.2@5072.31,3938.03 ; U1.32@5062.8,3610.85 ccw(c5062.8,3633.82) 5079.04,3617.57 ; U1.32@5063.72,3610.66 ccw(c5067.44,3619.33) 5074.12,3612.66 ; U1.32@5064.82,3607.32 cw(c5074.12,3601.88) 5074.12,3612.66
P0_3: D4.2 P_key.4 U1.33 | length 607.7
  Top Layer w15: P_key.4@4944.42,3855.58 ccw(c4906.82,3893.18) 4960,3893.18 ccw(c5013.18,3893.18) P_key.4@4975.58,3855.58 ; P_key.4@4960,3817.97 cw(c4960,3764.79) 4997.6,3802.4 cw(c5035.21,3840) P_key.4@4982.03,3840 ; 4960,3884.16 cw(c5036.18,3884.16) D4.2@4982.31,3938.03 ; 4960,3920.38 cw(c4999.96,3920.38) D4.2@4971.7,3948.63 ; D4.2 4960,3943.02 P_key.4 5038.19,3761.81 U1.33
P0_4: D5.2 P_key.5 U1.34 | length 755.9
  Top Layer w15: P_key.5@4844.42,3855.58 ccw(c4806.82,3893.18) 4860,3893.18 ccw(c4913.18,3893.18) P_key.5@4875.58,3855.58 ; P_key.5@4848.76,3858.94 ccw(c4830.23,3890.15) 4865.4,3881.18 ; P_key.5@4860,3817.97 cw(c4860,3728.58) 4923.21,3791.79 ; P_key.5@4860,3832.97 cw(c4860,3779.79) 4897.6,3817.4 ; P_key.5@4860,3860.02 cw(c4970.32,3860.02) D5.2@4892.31,3938.03 ; 4860,3896.23 cw(c4934.1,3896.23) D5.2@4881.7,3948.63 ; D5.2@4860,3932.45 cw(c4897.89,3932.45) D5.2@4871.1,3959.24 ; 4871.23,3904.06 ccw(c4938.47,3886.91) P_key.5@4878.91,3851.3 ; D5.2 4860,3933.02 P_key.5 4875,3840 4951.58,3763.42 U1.34 ; P_key.5@4882.03,3840 ccw(c4898.99,3840) 4887,3828
P0_5: D6.2 P_key.6 U1.35 | length 926.3
  Top Layer w15: P_key.6@4744.42,3855.58 ccw(c4706.82,3893.18) 4760,3893.18 ccw(c4813.18,3893.18) P_key.6@4775.58,3855.58 ; P_key.6@4748.99,3859.08 ccw(c4720.64,3908.18) 4775.4,3893.5 ; P_key.6@4760,3817.97 cw(c4760,3764.79) 4797.6,3802.4 cw(c4835.21,3840) P_key.6@4782.03,3840 ; P_key.6@4760,3836.02 cw(c4904.12,3836.02) D6.2@4802.3,3938.02 ; P_key.6 4760,3923.02 ; 4760,3872.19 cw(c4868.01,3872.19) D6.2@4791.7,3948.63 ; 4760,3908.36 cw(c4831.91,3908.36) D6.2@4781.11,3959.25 ; 4761.87,3924.9 ccw(c4736.37,3950.4) D6.2@4772.44,3950.4 ; P_key.6@4767.5,3832.5 4820,3780 4890.6,3780 4920.08,3750.52 U1.35 ; 4774.12,3888.7 ccw(c4822.09,3875.84) P_key.6@4779.08,3851.01 ; D6.2@4788.12,3933 ccw(c4784.52,3898.5) 4760,3923.02 ; D6.2 4760,3923.02 ; 4911.01,3759.59 cw(c4894.77,3743.35) U1.35@4917.74,3743.35
P0_6: D7.2 P_key.7 U1.36 | length 801.8
  Top Layer w15: P_key.7@4644.42,3855.58 ccw(c4606.82,3893.18) 4660,3893.18 ccw(c4713.18,3893.18) P_key.7@4675.58,3855.58 ; P_key.7 4660,3913.02 D7.2 ; 4665.69,3918.72 cw(c4699.94,3884.47) D7.2@4699.94,3932.9 ; 4671.87,3924.9 ccw(c4646.37,3950.4) D7.2@4682.44,3950.4 ; v4@4882.93,3657.07 ccw(c4869.28,3670.72) 4888.58,3670.72 ; 4888.58,3677.56 ccw(c4917.56,3677.56) v4@4897.07,3657.07 ; U1.36 4888.58,3666.42 v4@4890,3665
  Bottom Layer w15: P_key.7@4660,3817.97 cw(c4660,3764.79) 4697.6,3802.4 cw(c4735.21,3840) P_key.7@4682.03,3840 ; P_key.7 4850,3650 v4(4890,3650) ; v4@4882.93,3642.93 ccw(c4865.86,3625.86) 4865.86,3650 ccw(c4865.86,3674.14) v4@4882.93,3657.07
P0_7: D8.2 P_key.8 U1.37 | length 920.5
  Top Layer w10: P_key.8@4542.66,3822.66 cw(c4500.79,3780.79) 4560,3780.79 cw(c4619.21,3780.79) P_key.8@4577.34,3822.66 ; P_key.8@4549.73,3829.73 cw(c4524.93,3804.93) 4560,3804.93 cw(c4595.07,3804.93) P_key.8@4570.27,3829.73 ; P_key.8 4560,3730 4630,3660 4826.59,3660 4857.09,3690.5 U1.37 ; 4846.25,3679.66 ccw(c4831.77,3694.13) U1.37@4852.24,3694.13
  Top Layer w15: P_key.8@4544.42,3855.58 ccw(c4506.82,3893.18) 4560,3893.18 ccw(c4613.18,3893.18) P_key.8@4575.58,3855.58 ; P_key.8 4560,3913.02 D8.2 ; 4565.69,3918.72 cw(c4599.94,3884.47) D8.2@4599.94,3932.9 ; 4571.87,3924.9 ccw(c4546.37,3950.4) D8.2@4582.44,3950.4
VCC_IN: C3.1 C4.1 P1.4 U200.3 | length 2596.4
  Bottom Layer w30: U200.3 5175,3580 5510,3580 5560,3530 C3.1 5602.6,3470 C4.1 ; U200.3@5149.21,3520 cw(c5231.81,3520) 5173.4,3578.4 ; C3.1@5574.53,3427.4 cw(c5609.6,3427.4) C3.1@5584.8,3452.2
  Bottom Layer w40: P1.4 4840,2910 5561,2910 5878,3227 5878,3332 C4.1 ; C4.1@5740,3430.94 cw(c5740,3336.66) 5806.67,3403.33
WAKE: R8.1 U1.10 | length 2603.6
  Top Layer w10: 4518.35,3737.29 ccw(c4486.93,3728.87) v3(4492,3761) ; 4518.68,3733.85 cw(c4528.39,3770.08) v3(4492,3761) ; U1.10 4601.54,3356.54 4637,3392 4637,3618.5 4494.5,3761 v3(4492,3761) ; 4586.3,3356.54 cw(c4586.3,3368.23) 4578.03,3359.96 ccw(c4586.3,3368.23) 4586.3,3356.54 ; 4586.3,3356.54 ccw(c4586.3,3344.85) 4578.03,3353.11 cw(c4586.3,3344.85) 4586.3,3356.54 ; v3@4492,3741 cw(c4492,3686.67) 4530.42,3725.09 ccw(c4492,3686.67) v3@4492,3741 ; v3@4492,3751 cw(c4492,3720.81) 4513.35,3742.16 ccw(c4492,3720.81) v3@4492,3751 ; v3@4512,3761 ccw(c4554.24,3761) 4524.37,3731.13 cw(c4554.24,3761) v3@4512,3761
  Bottom Layer w15: v3@4479.63,3773.37 ccw(c4449.75,3803.25) 4492,3803.25 ccw(c4534.25,3803.25) v3@4504.37,3773.37 ; v3(4492,3761) 4492,3872 4620,4000 5523,4000 R8.1 ; 5796.76,3726.24 ccw(c5831,3760.49) R8.1@5831,3712.06 ; 5806.26,3716.74 cw(c5785.46,3695.94) R8.1@5814.88,3695.94
pads on no net: OLED.7 U1.1 U1.2 U1.3 U1.6 U1.11 U1.12 U1.13 U1.15 U1.17 U1.20 U1.21 U1.22 U1.23 U1.24 U1.25 U1.26 U1.27 U1.28 U1.38 U1.39 U1.40 U1.41 U1.42 U1.43 U1.44 U2.2 U2.3 U2.5 U2.6 U2.7 U2.8 U2.9 U2.10 U2.15 U2.16 U2.18 U2.22 U2.24 U2.25 U2.26 U2.27 U2.30 U2.31 U2.32 U2.33 U2.34 U2.35 U2.36 U2.37 U2.39 U2.40 U2.41 U2.42 U2.43 U200.4
copper on no net:
  other v2: 6049,2759 4408,2765 4370,4170

## Polygon pours and split planes (outlines as drawn)
GND on Top Layer "Top Overlay-No Net" (solid, remove dead copper, pour order 9): 5485,3929 5485,3890 5450,3855 5459,3846 5459,3286 5463,3286 5481,3268 5496,3253 6046,3253 6046,3930 6052,3936 6047,3931 5483,3931
GND on Top Layer "Top Overlay-No Net" (solid, remove dead copper, pour order 6): 4289.15,4266.19 4289.15,2754.19 4307.15,2736.19 4321.15,2722.19 6063.15,2722.19 6063.15,3127.19 6057.15,3133.19 5355.15,3133.19 5342.15,3133.19 5324.15,3151.19 5302.15,3173.19 5302.15,3350.19 5302.15,4269.19 5304.15,4271.19 5302.15,4269.19 4293.15,4269.19
GND on Bottom Layer "Top Overlay-No Net" (solid, remove dead copper, pour order 8): 5485,3929 5485,3890 5450,3855 5459,3846 5459,3286 5463,3286 5481,3268 5496,3253 6046,3253 6046,3930 6052,3936 6047,3931 5483,3931
GND on Bottom Layer "Top Overlay-No Net" (solid, remove dead copper, pour order 7): 4318,4234 4318,2722 4336,2704 4350,2690 6092,2690 6092,3095 6086,3101 5384,3101 5371,3101 5353,3119 5331,3141 5331,3318 5331,4237 5333,4239 5331,4237 4322,4237

## Keep-outs
Keep-Out Layer:
  lines w19.68: 4267,2662 4267,4267 4264,4270 4495,4270 ; 4272,2667 6176,2667 ; 4344,4271 4370,4271 4371,4270 4486,4270 ; 4477,4270 6165,4270 ; 6176,2684 6176,4262 ; 6176,2710 6180,2706 6180,2667

## Silkscreen, mask and mechanical layers (free items; w line width, h text height)
Top Overlay:
  lines w19.68: 4409,2764 4410,2763
  text "RX" at 4683,3154 h60
  text "TX" at 4904,3095 h60
  text "RX" at 4905,2955 h60
  text "TX" at 4747,2923 h60 r180
  text "+" at 4525,2830 h60
  text "VCC_IN" at 4665,2699 h40
  text "3.3V" at 4894,2694 h40

## Text inside footprints (layer, text, board x,y; h text height)
C2: Bottom Overlay "+" at 4859.95,3452.49 h30 r90
C4: Bottom Overlay "+" at 5809.95,3452.49 h30 r90
U2: Mechanical 6 "Polygon Pour cutout" at 5455,4300 h30
U200: Bottom Overlay "ASM1117" at 5260,3325 h30 r270